# EAGLE board menu_display_circuit (EAGLE 7.6.0)

Size 73.58 x 76.09 mm. Coordinates in mm from the lower left corner, seen from the top.
Outline: 0,0 56.82,0 56.82,53.33 0,53.33 0,0
Copper layers (1*16): Top 0.035mm / dielectric 1.5mm / Bottom 0.035mm
Design rules "default": minimum track width 10mil, minimum drill 24mil, track to track 8mil, track to pad 8mil, pad to pad 8mil, via to via 8mil, smd to smd 8mil, copper to edge 40mil, drill to drill 8mil, minimum pad ring 10mil, minimum via ring 8mil, stop-mask expansion 4mil, vias tented up to drill 0mil, thermal gap 10mil

## Footprints (pad centres in the part's own frame; a part is rotated, then mirrored left to right if it is on the bottom)
0207/10 = drill 0.813 octagon: 1 -5.08,0; 2 5.08,0
TL1105 = drill 1 pad 1.676: 1 -2.25,3.25; 2 2.25,3.25; 3 -2.25,-3.25; 4 2.25,-3.25
ARDUINO_UNO = drill 1.016 pad 1.88: 0 63.5,50.8; 1 60.96,50.8; 2 58.42,50.8; 3 55.88,50.8; 3.3V 35.56,2.54; 4 53.34,50.8; 5 50.8,50.8; 5V 38.1,2.54; 6 48.26,50.8; 7 45.72,50.8; 8 41.656,50.8; 9 39.116,50.8; 10 36.576,50.8; 11 34.036,50.8; 12 31.496,50.8; 13 28.956,50.8; A0 50.8,2.54; A1 53.34,2.54; A2 55.88,2.54; A3 58.42,2.54; A4 60.96,2.54; A5 63.5,2.54; AREF 23.876,50.8; GND 26.416,50.8; GND. 43.18,2.54; GND.. 40.64,2.54; I/OREF 30.48,2.54; N/C 27.94,2.54; RESET 33.02,2.54; SCL 18.796,50.8; SDA 21.336,50.8; VIN 45.72,2.54 | hole 3.2: 66.04,7.62; 66.04,35.56; 15.24,50.8; 13.97,2.54
1X16P-2.54-2.54-11.6-3.0-BLACK-MALE = drill 0.889 pad 1.651 square: 1 0,19.05 | drill 0.889 pad 1.651: 2 0,16.51; 3 0,13.97; 4 0,11.43; 5 0,8.89; 6 0,6.35; 7 0,3.81; 8 0,1.27; 9 0,-1.27; 10 0,-3.81; 11 0,-6.35; 12 0,-8.89; 13 0,-11.43; 14 0,-13.97; 15 0,-16.51; 16 0,-19.05

## Placement (x,y rotation side)
R1  220‎Ω  [0207/10]  5,35.48 0 top
R2  10k‎Ω  [0207/10]  5,86.28 0 top  (outside the outline)
R3  10k‎Ω  [0207/10]  5,98.98 0 top  (outside the outline)
R4  10k‎Ω  [0207/10]  5,111.68 0 top  (outside the outline)
Sb1  [TL1105]  5,48.18 0 top
Sb2  [TL1105]  5,60.88 0 top
Sb3  [TL1105]  5,73.58 0 top
Uarduino  [ARDUINO_UNO]  5,22.78 0 top
Ulcd  [1X16P-2.54-2.54-11.6-3.0-BLACK-MALE]  5,10.08 0 top

## Library data of the parts
R1-R4 Sb1-Sb3 Uarduino Ulcd = AUTODESK_CIRCUITS_BREADBOARD

## Nets
N$1: Uarduino.12 Ulcd.4
N$2: Uarduino.11 Ulcd.6
N$3: Uarduino.2 Ulcd.11
N$4: Uarduino.3 Ulcd.12
N$5: Uarduino.4 Ulcd.13
N$6: R1.1 Ulcd.15
N$7: Uarduino.5 Ulcd.14
N$8: R2.1 Sb1.1 Sb1.3 Uarduino.8
N$9: R3.1 Sb2.1 Sb2.3 Uarduino.9
N$10: R4.1 Sb3.1 Sb3.3 Uarduino.10
N$11: Ulcd.9
N$12: Ulcd.10
N$13: Ulcd.7
N$14: Ulcd.8
N$15: R1.2 Sb1.2 Sb1.4 Sb2.2 Sb2.4 Sb3.2 Sb3.4 Uarduino.5V Ulcd.2
N$16: R2.2 R3.2 R4.2 Uarduino.GND Ulcd.1 Ulcd.3 Ulcd.5 Ulcd.16

## Tracks (layer width: path | path; a pad name or v marks a point on that pad's centre or on a via)
N$1  (1 unrouted)
N$2  (1 unrouted)
N$3  (1 unrouted)
N$4  (1 unrouted)
N$5  (1 unrouted)
N$6  (1 unrouted)
N$7  (1 unrouted)
N$8  (3 unrouted)
N$9  (3 unrouted)
N$10  (3 unrouted)
N$15  (8 unrouted)
N$16  (7 unrouted)